# Altium PCB XILINX ARTIX-7 FPGA A704 Motherboard_CON.PcbDoc
Units mil, origin at the board's own origin, x right, y up, seen from the top; angles counter-clockwise.
Board outline 3196.9 x 1937.1 mil, 4 copper layers (TOP, L2_G, L3_P, BOTTOM), stack 33.77 mil thick; 3 components, 169 nets, 200 pads, 0 vias.
Unrouted connection lines stored in the file: 25.
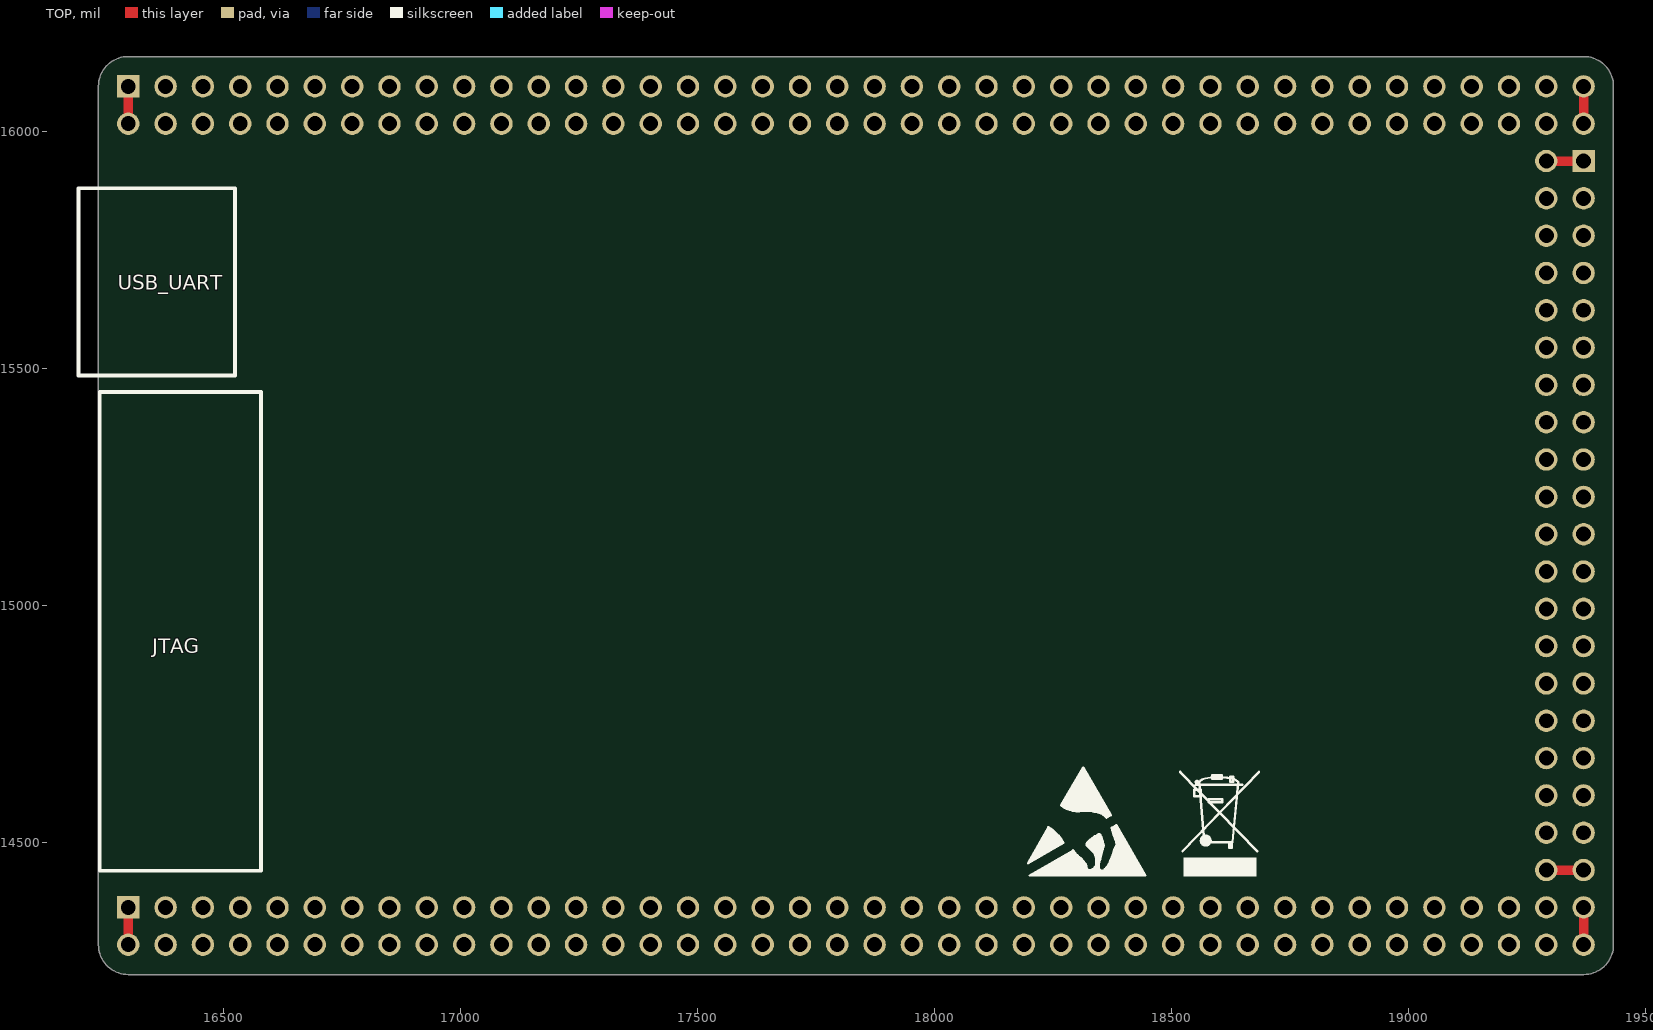
[diagram p0: TOP view]
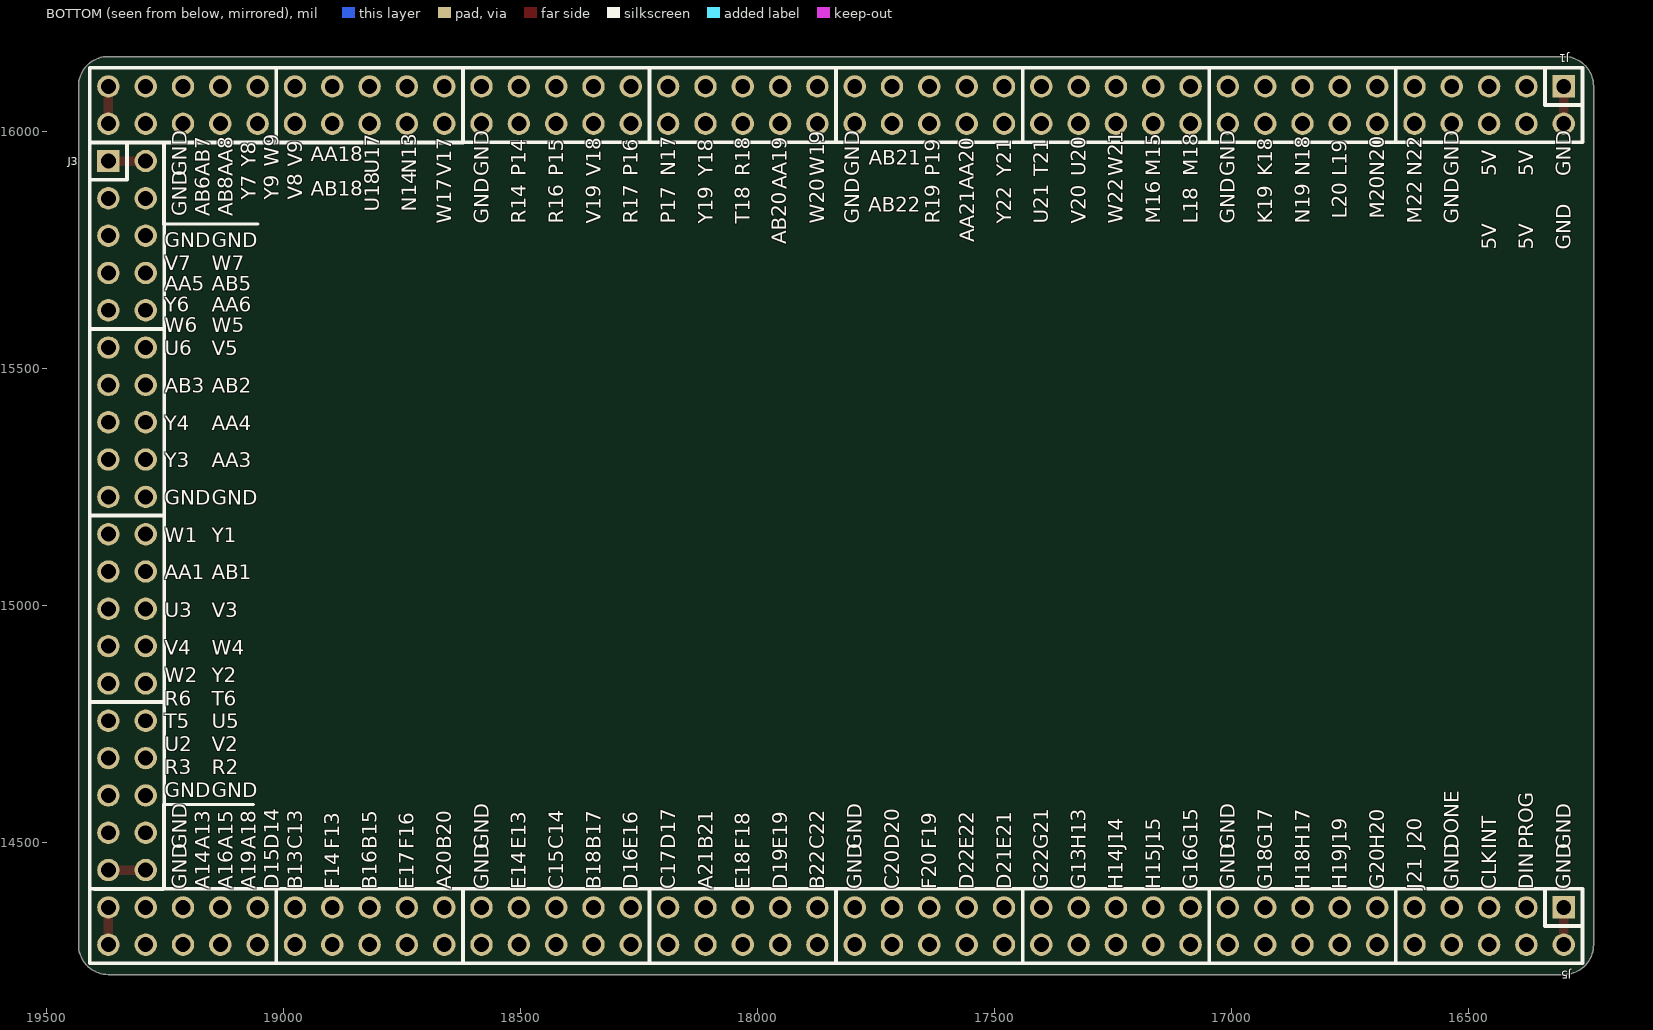
[diagram p1: BOTTOM view, seen from below]
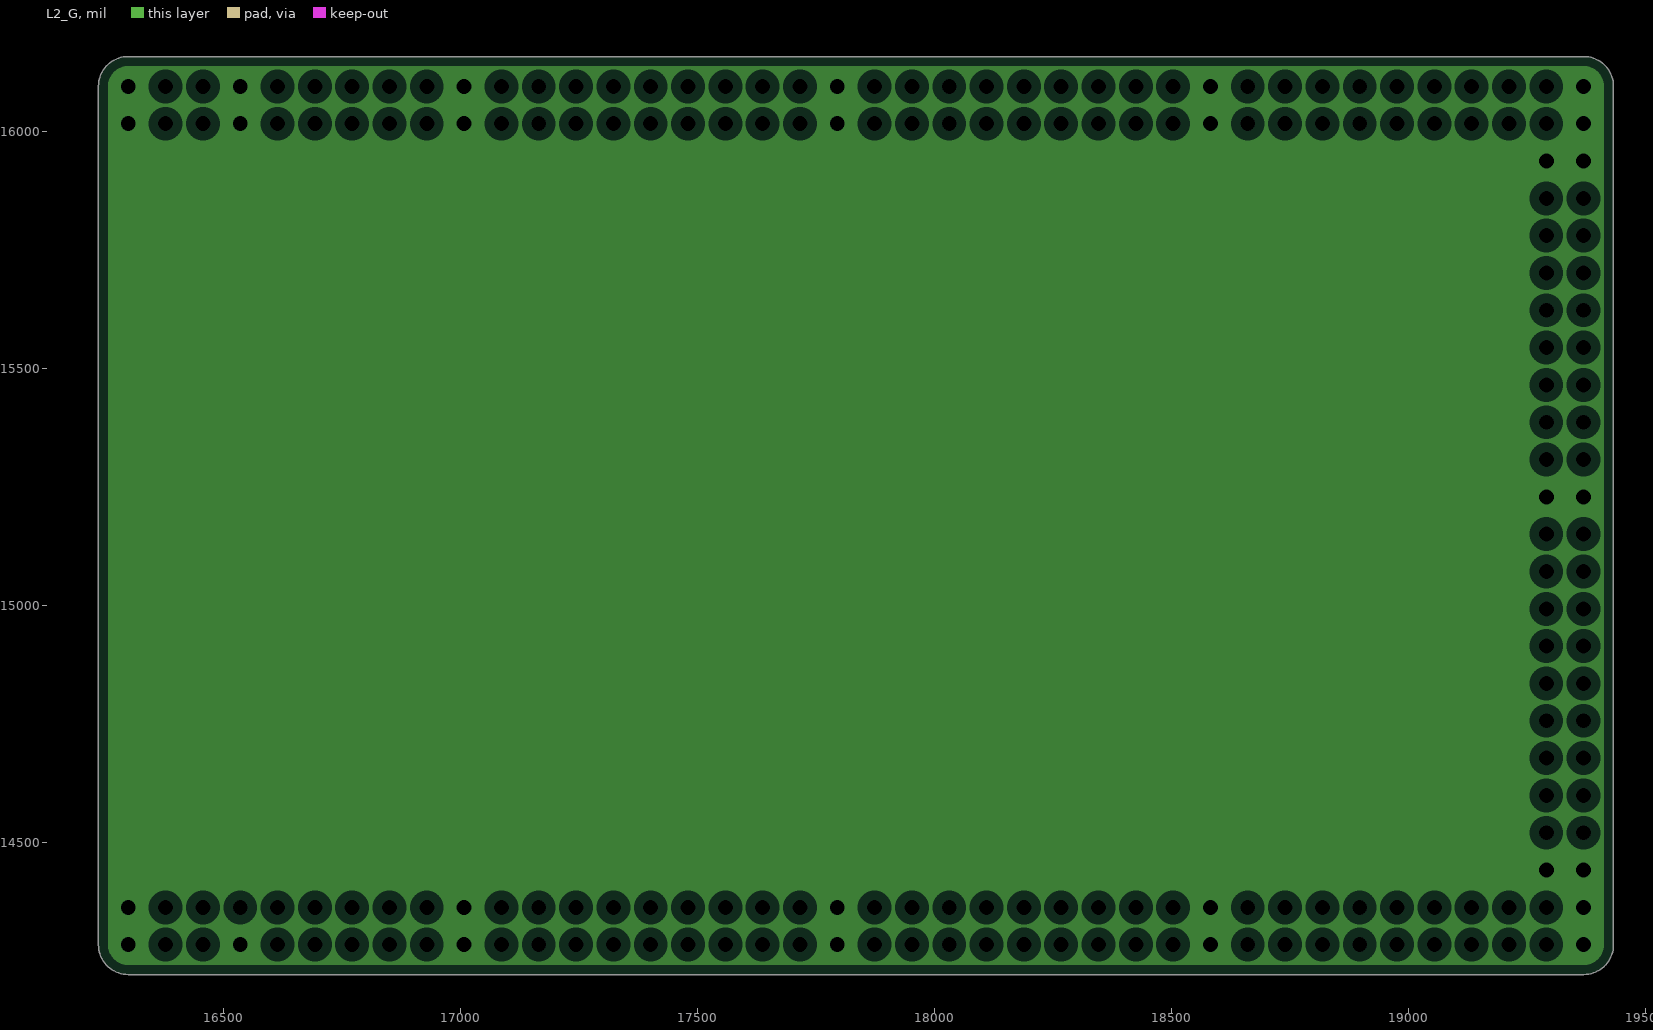
[diagram p2: L2_G, clearances drawn from the general rule]
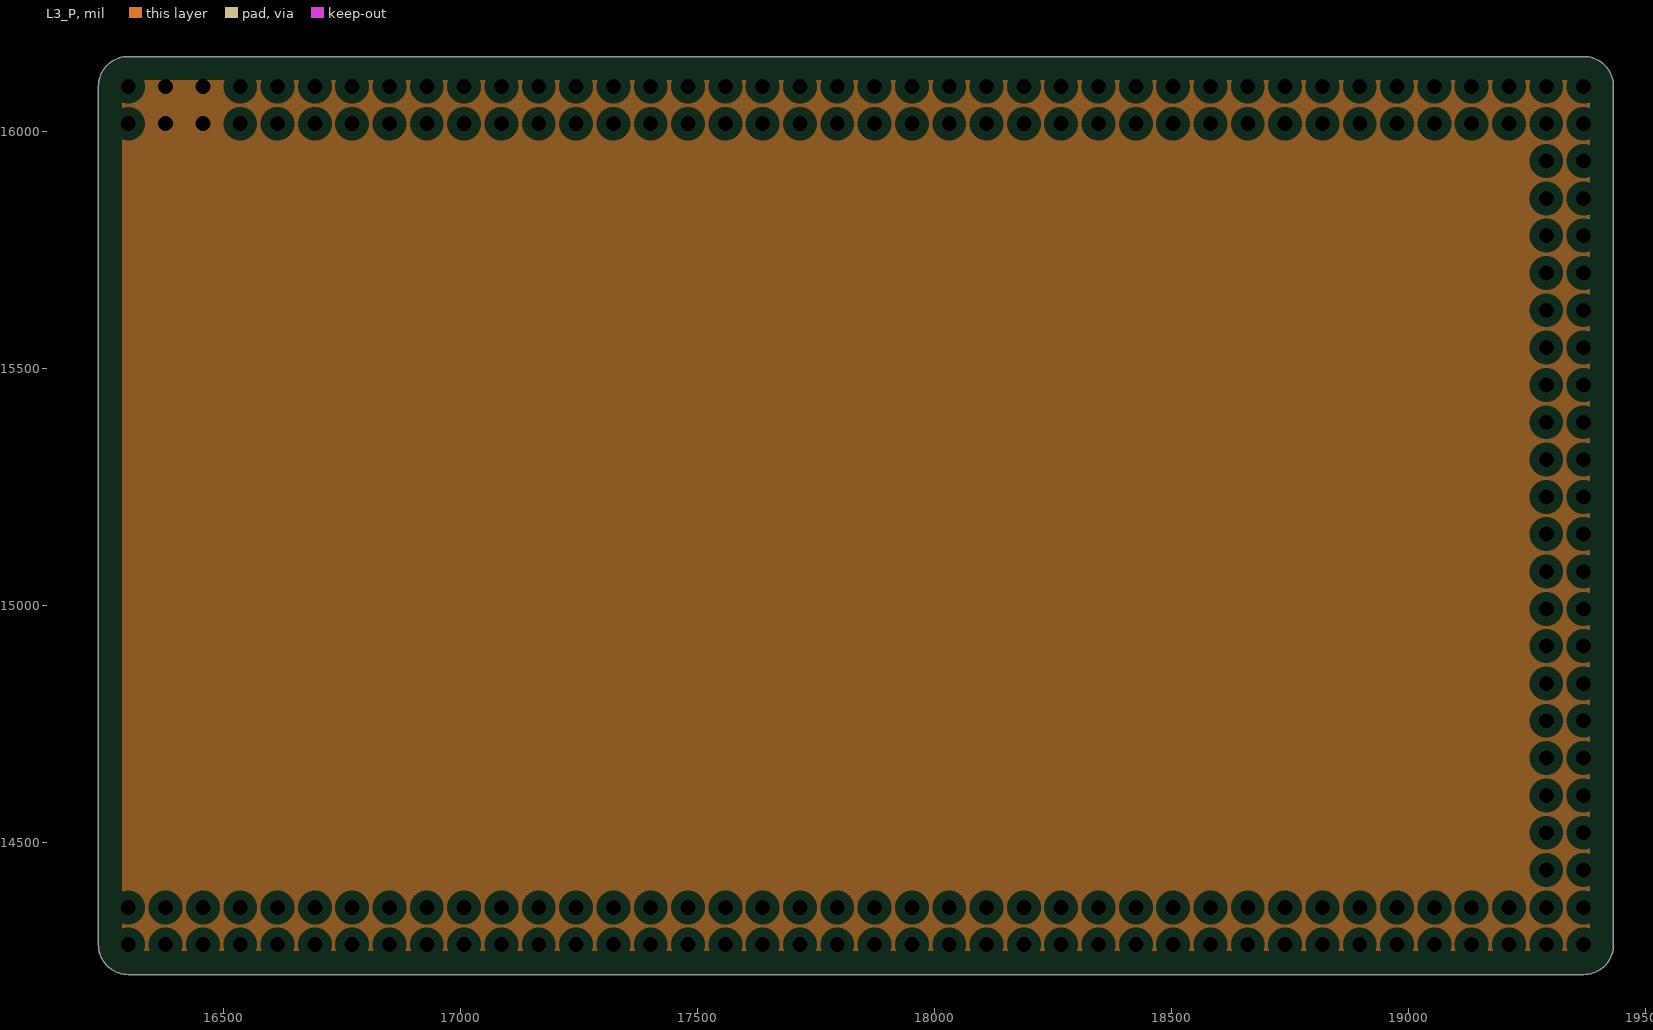
[diagram p3: L3_P, clearances drawn from the general rule]

## Layer stack, top to bottom
TOP: signal copper 1.38
Dielectric: core 3.01, FR-4, Dk 4.3
L2_G: plane copper 1.4, net GND
Dielectric: prepreg 12.6, FR-4, Dk 4.8
L3_P: plane copper 1.4, net +5V
Dielectric: core 12.6, FR-4, Dk 4.8
BOTTOM: signal copper 1.38

## Board outline
16235.38,14283.97 ccw(c16298.38,14283.97) 16298.38,14220.97 19369.38,14220.97 ccw(c19369.38,14283.87) 19432.28,14283.87 19432.28,16095.07 ccw(c19369.28,16095.07) 19369.28,16158.07 16298.38,16158.07 ccw(c16298.38,16095.07) 16235.38,16095.07

## Design rules (kind name [scope] priority, off if disabled: settings)
Clearance [All] p1: gap=10
ComponentClearance [All] p1 off: gap=10 collisioncheckmode=3 verticalgap=10 showdistances=FALSE
MinimumSolderMaskSliver [All] p1 off: minsoldermaskwidth=10
PlaneClearance [All] p1: clearance=20
PlaneConnect [All] p1: planeconnectstyle=Direct reliefexpansion=20 reliefentries=4 reliefconductorwidth=10 reliefairgap=10
PolygonConnect [All] p1: connectstyle=Direct reliefconductorwidth=10 reliefentries=4 polygonreliefangle="90 Angle"
RoutingVias [All] p1: holewidth=28 width=50 viastyle="Through Hole" minholewidth=28 minwidth=50 maxholewidth=28 maxwidth=50
SilkToSilkClearance [All] p1 off: silktosilkclearance=10
SilkscreenOverComponentPads [All] p1 off: minsilkscreentomaskgap=10
SolderMaskExpansion [All] p1: expansion=4
Width [All] p1: maxlimit=100 minlimit=4 preferedwidth=10
22 further rules are at their usual default settings.

## Components (designator, comment, footprint, x,y, rotation, side; value= is the part's Value field where it differs from the comment)
J1 "CONN PLUG 40x2" HDR2X40_2P0 17833.84,16055.65 r180 bottom locked
J3 "CONN PLUG 20x2" HDR2X20_2P0 19329.87,15189.31 r90 bottom locked
J5 "CONN PLUG 40x2" HDR2X40_2P0 17833.84,14323.37 r180 bottom locked

## Footprints (in the part's own frame and the unit in brackets; to place one, negate y for a bottom-side part, rotate by r counter-clockwise, add the part's x,y. Pads: shape width x height; smd on the part's side, far side on the other; paste and mask are expansions set on the pad)
HDR2X20_2P0 [mil] "HDR2X20_2P0"
  rect 47.24x47.24 hole 31.5: 1(748.23,39.37)
  round 47.24 hole 31.5: 2(748.23,-39.37) 3(669.49,39.37) 4(669.49,-39.37) 5(590.75,39.37) 6(590.75,-39.37) 7(512.01,39.37) 8(512.01,-39.37) 9(433.27,39.37) 10(433.27,-39.37) 11(354.53,39.37) 12(354.53,-39.37) 13(275.79,39.37) 14(275.79,-39.37) 15(197.05,39.37) 16(197.05,-39.37) 17(118.31,39.37) 18(118.31,-39.37) 19(39.57,39.37) 20(39.57,-39.37) 21(-39.17,39.37) 22(-39.17,-39.37) 23(-117.91,39.37) 24(-117.91,-39.37) 25(-196.65,39.37) 26(-196.65,-39.37) 27(-275.39,39.37) 28(-275.39,-39.37) 29(-354.13,39.37) 30(-354.13,-39.37) 31(-432.87,39.37) 32(-432.87,-39.37) 33(-511.61,39.37) 34(-511.61,-39.37) 35(-590.35,39.37) 36(-590.35,-39.37) 37(-669.09,39.37) 38(-669.09,-39.37) 39(-747.83,39.37) 40(-747.83,-39.37)
  silkscreen extent -787,-79 788,79
HDR2X40_2P0 [mil] "HDR2X40_2P0"
  rect 47.24x47.24 hole 31.5: 1(1535.46,39.37)
  round 47.24 hole 31.5: 2(1535.46,-39.37) 3(1456.72,39.37) 4(1456.72,-39.37) 5(1377.98,39.37) 6(1377.98,-39.37) 7(1299.24,39.37) 8(1299.24,-39.37) 9(1220.5,39.37) 10(1220.5,-39.37) 11(1141.76,39.37) 12(1141.76,-39.37) 13(1063.02,39.37) 14(1063.02,-39.37) 15(984.28,39.37) 16(984.28,-39.37) 17(905.54,39.37) 18(905.54,-39.37) 19(826.8,39.37) 20(826.8,-39.37) 21(748.06,39.37) 22(748.06,-39.37) 23(669.32,39.37) 24(669.32,-39.37) 25(590.58,39.37) 26(590.58,-39.37) 27(511.84,39.37) 28(511.84,-39.37) 29(433.1,39.37) 30(433.1,-39.37) 31(354.36,39.37) 32(354.36,-39.37) 33(275.62,39.37) 34(275.62,-39.37) 35(196.88,39.37) 36(196.88,-39.37) 37(118.14,39.37) 38(118.14,-39.37) 39(39.4,39.37) 40(39.4,-39.37) 41(-39.34,39.37) 42(-39.34,-39.37) 43(-118.08,39.37) 44(-118.08,-39.37) 45(-196.82,39.37) 46(-196.82,-39.37) 47(-275.56,39.37) 48(-275.56,-39.37) 49(-354.3,39.37) 50(-354.3,-39.37) 51(-433.04,39.37) 52(-433.04,-39.37) 53(-511.78,39.37) 54(-511.78,-39.37) 55(-590.52,39.37) 56(-590.52,-39.37) 57(-669.26,39.37) 58(-669.26,-39.37) 59(-748,39.37) 60(-748,-39.37) 61(-826.74,39.37) 62(-826.74,-39.37) 63(-905.48,39.37) 64(-905.48,-39.37) 65(-984.22,39.37) 66(-984.22,-39.37) 67(-1062.96,39.37) 68(-1062.96,-39.37) 69(-1141.7,39.37) 70(-1141.7,-39.37) 71(-1220.44,39.37) 72(-1220.44,-39.37) 73(-1299.18,39.37) 74(-1299.18,-39.37) 75(-1377.92,39.37) 76(-1377.92,-39.37) 77(-1456.66,39.37) 78(-1456.66,-39.37) 79(-1535.4,39.37) 80(-1535.4,-39.37)
  silkscreen extent -1575,-79 1575,79

## Part data
J3: library part "CONN PLUG 20x2_0"

## Nets (pads, with @x,y where several pads share a name; then routed paths per layer and width w, separated by ;. In a path a pad name is that pad's centre, name@x,y a point inside that pad or via, vN(x,y) a via of type N, cw(c..) or ccw(c..) an arc to the next point about the centre after c; other vN are vias at no path point)
+5V: J1.3 J1.4 J1.5 J1.6
A13_L10P_16: J5.77
A14_L10N_16: J5.78
A15_L9P_16: J5.75
A16_L9N_16: J5.76
A18_L17P_16: J5.73
A19_L17N_16: J5.74
A20_L16N_16: J5.62
A21_L21N_16: J5.48
AA1_L7P_34: J3.23
AA3_L9N_34: J3.18
AA4_L11N_SRCC_34: J3.16
AA5_L10P_34: J3.5
AA6_L18N_34: J3.8
AA8_L22P_34: J1.75
AA18_L17P_14: J1.67
AA19_L15P_14: J1.43
AA20_L8P_14: J1.33
AA21_L8N_14: J1.34
AB1_L7N_34: J3.24
AB2_L8N_34: J3.14
AB3_L8P_34: J3.13
AB5_L10N_34: J3.6
AB6_L20N_34: J1.78
AB7_L20P_34: J1.77
AB8_L22N_34: J1.76
AB18_L17N_14: J1.68
AB20_L15N_14: J1.44
AB21_L10P_14: J1.37
AB22_L10N_14: J1.38
B13_L8N_16: J5.70
B15_L7P_16: J5.65
B16_L7N_16: J5.66
B17_L11P_SRCC_16: J5.53
B18_L11N_SRCC_16: J5.54
B20_L16P_16: J5.61
B21_L21P_16: J5.47
B22_L20N_16: J5.42
C13_L8P_16: J5.69
C14_L3P_16: J5.55
C15_L3N_16: J5.56
C17_L12N_MRCC_16: J5.50
C20_L19N_16: J5.38
C22_L20P_16: J5.41
D14_L6P_16: J5.71
D15_L6N_16: J5.72
D16_L5N_16: J5.52
D17_L12P_MRCC_16: J5.49
D19_L14N_SRCC_16: J5.44
D20_L19P_16: J5.37
D21_L23N_16: J5.32
D22_L22N_16: J5.34
E13_L4P_16: J5.57
E14_L4N_16: J5.58
E16_L5P_16: J5.51
E17_L2N_16: J5.64
E18_L15N_16: J5.46
E19_L14P_SRCC_16: J5.43
E21_L23P_16: J5.31
E22_L22P_16: J5.33
F13_L1P_16: J5.67
F14_L1N_16: J5.68
F16_L2P_16: J5.63
F18_L15P_16: J5.45
F19_L18P_16: J5.35
F20_L18N_16: J5.36
G11_DONE_0: J5.7
G13_L1N_15: J5.28
G15_L2P_15: J5.21
G16_L2N_15: J5.22
G17_L4P_15: J5.17
G18_L4N_15: J5.18
G20_L8N_15: J5.12
G21_L24P_16: J5.29
G22_L24N_16: J5.30
GND: J1.1 J1.2 J1.7 J1.8 J1.19 J1.20 J1.39 J1.40 J1.59 J1.60 J1.79 J1.80 J3.1 J3.2 J3.19 J3.20 J3.39 J3.40 J5.1 J5.2 J5.8 J5.19 J5.20 J5.39 J5.40 J5.59 J5.60 J5.79 J5.80 | length 472.4
  TOP w20: J5.2 J5.1 ; J1.2 J1.1 ; J3.40 J3.39 ; J3.2 J3.1 ; J5.80 J5.79 ; J1.80 J1.79
H13_L1P_15: J5.27
H14_L3N_15: J5.26
H15_L5N_15: J5.24
H17_L6P_15: J5.15
H18_L6N_15: J5.16
H19_L12N_MRCC_15: J5.14
H20_L8P_15: J5.11
J14_L3P_15: J5.25
J15_L5P_15: J5.23
J19_L12P_MRCC_15: J5.13
J20_L11P_SRCC_15: J5.9
J21_L11N_SRCC_15: J5.10
K18_L13P_MRCC_15: J1.17
K19_L13N_MRCC_15: J1.18
L12_CCLK_0: J5.6
L18_L16N_15: J1.22
L19_L14P_SRCC_15: J1.13
L20_L14N_SRCC_15: J1.14
M15_L24P_15: J1.23
M16_L24N_15: J1.24
M18_L16P_15: J1.21
M20_L18N_15: J1.12
M22_L15N_15: J1.10
N12_PROGRAM_B_0: J5.3
N13_L23P_14: J1.63
N14_L23N_14: J1.64
N17_L21P_14: J1.49
N18_L17P_15: J1.15
N19_L17N_15: J1.16
N20_L18P_15: J1.11
N22_L15P_15: J1.9
P14_L19P_14: J1.57
P15_L22P_14: J1.55
P16_L24P_14: J1.51
P17_L21N_14: J1.50
P19_L5P_14: J1.35
R2_L3N_34: J3.38
R3_L3P_34: J3.37
R6_L17P_34: J3.31
R14_L19N_14: J1.58
R16_L22N_14: J1.56
R17_L24N_14: J1.52
R18_L20P_14: J1.45
R19_L5N_14: J1.36
R22_IO_DIN_14: J5.4
T5_L14P_SRCC_34: J3.33
T6_L17N_34: J3.32
T18_L20N_14: J1.46
T21_L4P_14: J1.29
U2_L2P_34: J3.35
U3_L6P_34: J3.25
U5_L14N_SRCC_34: J3.34
U6_L16P_34: J3.11
U12_INIT_B_0: J5.5
U17_L18P_14: J1.65
U18_L18N_14: J1.66
U20_L11P_SRCC_14: J1.27
U21_L4N_14: J1.30
V2_L2N_34: J3.36
V3_L6N_34: J3.26
V4_L12P_MRCC_34: J3.27
V5_L16N_34: J3.12
V7_L19P_34: J3.3
V8_L21N_34: J1.70
V9_L21P_34: J1.69
V17_L16P_14: J1.61
V18_L14P_SRCC_14: J1.53
V19_L14N_SRCC_14: J1.54
V20_L11N_SRCC_14: J1.28
W1_L5P_34: J3.21
W2_L4P_34: J3.29
W4_L12N_MRCC_34: J3.28
W5_L15N_34: J3.10
W6_L15P_34: J3.9
W7_L19N_34: J3.4
W9_L24P_34: J1.71
W17_L16N_14: J1.62
W19_L12P_MRCC_14: J1.41
W20_L12N_MRCC_14: J1.42
W21_L7P_14: J1.25
W22_L7N_14: J1.26
Y1_L5N_34: J3.22
Y2_L4N_34: J3.30
Y3_L9P_34: J3.17
Y4_L11P_SRCC_34: J3.15
Y6_L18P_34: J3.7
Y7_L23N_34: J1.74
Y8_L23P_34: J1.73
Y9_L24N_34: J1.72
Y18_L13P_MRCC_14: J1.47
Y19_L13N_MRCC_14: J1.48
Y21_L9P_14: J1.31
Y22_L9N_14: J1.32

## Polygon pours and split planes (outlines as drawn)
no net on Top Overlay (solid): 18584.12,14503.67 18584.13,14503.67 18584.08,14504.74 18583.94,14505.8 18583.71,14506.84 18583.39,14507.86 18582.98,14508.85 18582.49,14509.8 18581.91,14510.7 18581.26,14511.55 18580.54,14512.34 18579.75,14513.06 18578.9,14513.71 18578,14514.29 18577.05,14514.78 18576.06,14515.19 18575.04,14515.51 18574,14515.74 18572.94,14515.88 18571.87,14515.93 18570.8,14515.88 18569.74,14515.74 18568.7,14515.51 18567.68,14515.19 18566.69,14514.78 18565.74,14514.29 18564.84,14513.71 18563.99,14513.06 18563.2,14512.34 18562.48,14511.55 18561.83,14510.7 18561.25,14509.8 18560.76,14508.85 18560.35,14507.86 18560.03,14506.84 18559.8,14505.8 18559.66,14504.74 18559.61,14503.67 18559.66,14502.6 18559.8,14501.54 18560.03,14500.5 18560.35,14499.48 18560.76,14498.49 18561.25,14497.54 18561.83,14496.64 18562.48,14495.79 18563.2,14495 18563.99,14494.28 18564.84,14493.63 18565.74,14493.05 18566.69,14492.56 18567.68,14492.15 18568.7,14491.83 18569.74,14491.6 18570.8,14491.46 18571.87,14491.41 18572.94,14491.46 18574,14491.6 18575.04,14491.83 18576.06,14492.15 18577.05,14492.56 18578,14493.05 18578.9,14493.63 18579.75,14494.28 18580.54,14495 18581.26,14495.79 18581.91,14496.64 18582.49,14497.54 18582.98,14498.49 18583.39,14499.48 18583.71,14500.5 18583.94,14501.54 18584.08,14502.6 18584.12,14503.67
no net on Top Overlay (solid): 18574.85,14503.7 18574.84,14503.98 18574.8,14504.25 18574.74,14504.52 18574.66,14504.78 18574.55,14505.04 18574.43,14505.28 18574.28,14505.52 18574.11,14505.74 18573.92,14505.94 18573.72,14506.13 18573.5,14506.3 18573.26,14506.45 18573.02,14506.57 18572.76,14506.68 18572.5,14506.76 18572.23,14506.82 18571.96,14506.86 18571.68,14506.87 18571.4,14506.86 18571.13,14506.82 18570.86,14506.76 18570.6,14506.68 18570.34,14506.57 18570.1,14506.45 18569.86,14506.3 18569.64,14506.13 18569.44,14505.94 18569.25,14505.74 18569.08,14505.52 18568.93,14505.28 18568.81,14505.04 18568.7,14504.78 18568.62,14504.52 18568.56,14504.25 18568.52,14503.98 18568.52,14503.7 18568.51,14503.7 18568.52,14503.42 18568.56,14503.15 18568.62,14502.88 18568.7,14502.62 18568.81,14502.36 18568.93,14502.11 18569.08,14501.88 18569.25,14501.66 18569.44,14501.46 18569.64,14501.27 18569.86,14501.1 18570.1,14500.95 18570.34,14500.83 18570.6,14500.72 18570.86,14500.64 18571.13,14500.58 18571.4,14500.54 18571.68,14500.53 18571.96,14500.54 18572.23,14500.58 18572.5,14500.64 18572.76,14500.72 18573.02,14500.83 18573.26,14500.95 18573.5,14501.1 18573.72,14501.27 18573.92,14501.46 18574.11,14501.66 18574.28,14501.88 18574.43,14502.11 18574.55,14502.36 18574.66,14502.62 18574.74,14502.88 18574.8,14503.15 18574.84,14503.42 18574.85,14503.7
no net on Top Overlay (solid): 18558.08,14626.96 18558.09,14626.96 18558.07,14627.36 18558.02,14627.76 18557.93,14628.16 18557.81,14628.54 18557.66,14628.91 18557.47,14629.27 18557.25,14629.61 18557.01,14629.93 18556.74,14630.23 18556.44,14630.5 18556.12,14630.74 18555.78,14630.96 18555.42,14631.15 18555.05,14631.3 18554.67,14631.42 18554.27,14631.51 18553.87,14631.56 18553.47,14631.58 18553.07,14631.56 18552.67,14631.51 18552.27,14631.42 18551.89,14631.3 18551.52,14631.15 18551.16,14630.96 18550.82,14630.74 18550.5,14630.5 18550.2,14630.23 18549.93,14629.93 18549.69,14629.61 18549.47,14629.27 18549.28,14628.91 18549.13,14628.54 18549.01,14628.16 18548.92,14627.76 18548.87,14627.36 18548.85,14626.96 18548.87,14626.56 18548.92,14626.16 18549.01,14625.76 18549.13,14625.38 18549.28,14625.01 18549.47,14624.65 18549.69,14624.31 18549.93,14623.99 18550.2,14623.69 18550.5,14623.42 18550.82,14623.18 18551.16,14622.96 18551.52,14622.77 18551.89,14622.62 18552.27,14622.5 18552.67,14622.41 18553.07,14622.36 18553.47,14622.34 18553.87,14622.36 18554.27,14622.41 18554.67,14622.5 18555.05,14622.62 18555.42,14622.77 18555.78,14622.96 18556.12,14623.18 18556.44,14623.42 18556.74,14623.69 18557.01,14623.99 18557.25,14624.31 18557.47,14624.65 18557.66,14625.01 18557.81,14625.38 18557.93,14625.76 18558.02,14626.16 18558.07,14626.56 18558.08,14626.96
no net on Top Overlay (solid): 18525.61,14428.03 18525.61,14467.03 18678.61,14467.03 18678.61,14428.03 18525.61,14428.03
GND on L2_G (split plane): 19374.89,16137.69 19380.41,16136.6 19385.73,16134.79 19390.78,16132.3 19395.45,16129.18 19399.68,16125.47 19403.39,16121.24 19406.51,16116.57 19409,16111.52 19410.81,16106.2 19411.9,16100.68 19412.24,16095.61 19412.18,16095.07 19412.18,14283.87 19412.24,14283.33 19411.9,14278.27 19410.81,14272.77 19409.01,14267.46 19406.53,14262.42 19403.41,14257.76 19399.71,14253.54 19395.49,14249.84 19390.83,14246.72 19385.79,14244.24 19380.48,14242.44 19374.98,14241.35 19369.92,14241.01 19369.38,14241.07 16298.38,14241.07 16297.84,14241.01 16292.77,14241.35 16287.25,14242.44 16281.93,14244.25 16276.88,14246.74 16272.21,14249.86 16267.98,14253.57 16264.27,14257.8 16261.15,14262.47 16258.66,14267.52 16256.85,14272.84 16255.76,14278.36 16255.42,14283.43 16255.48,14283.97 16255.48,16095.07 16255.42,16095.61 16255.76,16100.68 16256.85,16106.2 16258.66,16111.52 16261.15,16116.57 16264.27,16121.24 16267.98,16125.47 16272.21,16129.18 16276.88,16132.3 16281.93,16134.79 16287.25,16136.6 16292.77,16137.69 16297.84,16138.03 16298.38,16137.97 19369.28,16137.97 19369.82,16138.03
+5V on L3_P (split plane): 16298.38,16107.99 19369.28,16107.99 19369.55,16108.01 19371.81,16107.78 19374.24,16107.05 19376.48,16105.85 19378.45,16104.24 19380.06,16102.27 19381.26,16100.03 19381.99,16097.6 19382.22,16095.34 19382.2,16095.07 19382.2,14283.87 19382.22,14283.61 19381.99,14281.36 19381.26,14278.95 19380.07,14276.72 19378.47,14274.78 19376.53,14273.18 19374.3,14271.99 19371.89,14271.26 19369.64,14271.03 19369.38,14271.05 16298.38,14271.05 16298.11,14271.03 16295.85,14271.26 16293.42,14271.99 16291.18,14273.19 16289.21,14274.8 16287.6,14276.77 16286.4,14279.01 16285.67,14281.44 16285.44,14283.7 16285.46,14283.97 16285.46,16095.07 16285.44,16095.34 16285.67,16097.6 16286.4,16100.03 16287.6,16102.27 16289.21,16104.24 16291.18,16105.85 16293.42,16107.05 16295.85,16107.78 16298.11,16108.01

## Silkscreen, mask and mechanical layers (free items; w line width, h text height)
Top Overlay:
  drawing of 403 lines, arcs and shapes, not listed
  text "USB_UART" at 16276.48,15665.57 h31
  text "JTAG" at 16348.48,14898.47 h31
Bottom Overlay:
  lines w6: 19053.38,15804.97 19253.38,15804.97 19253.38,15974.97 19403.38,15974.97 ; 19063.38,14579.97 19253.38,14579.97 19253.38,14399.97 19398.38,14399.97
  text "AA18" at 18942.38,15937.5 h31
  text "AB21" at 17765.28,15930 h31
  text "V9" at 18960.65,15925.67 h31 r270
  text "W9" at 19009.39,15925.67 h31 r270
  text "Y8" at 19058.13,15925.67 h31 r270
  text "N13" at 18719.43,15910.67 h31 r270
  text "U17" at 18798.17,15910.67 h31 r270
  text "GND" at 16283.49,15905.67 h31 r270
  text "5V" at 16362.23,15905.67 h31 r270
  text "5V" at 16440.97,15905.67 h31 r270
  text "GND" at 16519.71,15905.67 h31 r270
  text "N22" at 16598.45,15905.67 h31 r270
  text "N20" at 16677.19,15905.67 h31 r270
  text "L19" at 16755.93,15905.67 h31 r270
  text "N18" at 16834.67,15905.67 h31 r270
  text "K18" at 16913.41,15905.67 h31 r270
  text "GND" at 16992.15,15905.67 h31 r270
  text "M18" at 17070.89,15905.67 h31 r270
  text "M15" at 17149.63,15905.67 h31 r270
  text "W21" at 17228.37,15905.67 h31 r270
  text "U20" at 17307.11,15905.67 h31 r270
  text "T21" at 17385.85,15905.67 h31 r270
  text "Y21" at 17464.59,15905.67 h31 r270
  text "P19" at 17615.07,15905.67 h31 r270
  text "GND" at 17784.55,15905.67 h31 r270
  text "W19" at 17858.29,15905.67 h31 r270
  text "R18" at 18015.77,15905.67 h31 r270
  text "Y18" at 18094.51,15905.67 h31 r270
  text "N17" at 18173.25,15905.67 h31 r270
  text "P16" at 18251.99,15905.67 h31 r270
  text "V18" at 18330.73,15905.67 h31 r270
  text "P15" at 18409.47,15905.67 h31 r270
  text "P14" at 18488.21,15905.67 h31 r270
  text "GND" at 18566.95,15905.67 h31 r270
  text "V17" at 18645.69,15905.67 h31 r270
  text "AA8" at 19106.87,15905.67 h31 r270
  text "AB7" at 19155.61,15905.67 h31 r270
  text "GND" at 19204.35,15905.67 h31 r270
  text "AA19" at 17938.23,15878.17 h31 r270
  text "AA20" at 17542.83,15876.67 h31 r270
  text "AB18" at 18941.88,15864.7 h31
  text "V8" at 18960.65,15855.67 h31 r270
  text "Y9" at 19009.39,15855.67 h31 r270
  text "Y7" at 19058.13,15855.67 h31 r270
  text "N14" at 18719.43,15830.67 h31 r270
  text "U18" at 18798.17,15830.67 h31 r270
  text "AB22" at 17766.08,15830.4 h31
  text "AB8" at 19106.87,15820.67 h31 r270
  text "AB6" at 19155.61,15820.67 h31 r270
  text "GND" at 19204.35,15820.67 h31 r270
  text "M20" at 16677.19,15815.67 h31 r270
  text "L20" at 16755.93,15815.67 h31 r270
  text "GND" at 16519.71,15805.67 h31 r270
  text "M22" at 16598.45,15805.67 h31 r270
  text "N19" at 16834.67,15805.67 h31 r270
  text "K19" at 16913.41,15805.67 h31 r270
  text "GND" at 16992.15,15805.67 h31 r270
  text "L18" at 17070.89,15805.67 h31 r270
  text "M16" at 17149.63,15805.67 h31 r270
  text "W22" at 17228.37,15805.67 h31 r270
  text "V20" at 17307.11,15805.67 h31 r270
  text "U21" at 17385.85,15805.67 h31 r270
  text "Y22" at 17464.59,15805.67 h31 r270
  text "R19" at 17615.07,15805.67 h31 r270
  text "GND" at 17784.55,15805.67 h31 r270
  text "W20" at 17858.29,15805.67 h31 r270
  text "T18" at 18015.77,15805.67 h31 r270
  text "Y19" at 18094.51,15805.67 h31 r270
  text "P17" at 18173.25,15805.67 h31 r270
  text "R17" at 18251.99,15805.67 h31 r270
  text "V19" at 18330.73,15805.67 h31 r270
  text "R16" at 18409.47,15805.67 h31 r270
  text "R14" at 18488.21,15805.67 h31 r270
  text "GND" at 18566.95,15805.67 h31 r270
  text "W17" at 18645.69,15805.67 h31 r270
  text "AA21" at 17541.83,15765.97 h31 r270
  text "AB20" at 17938.53,15762.27 h31 r270
  text "GND" at 19150.78,15756 h31
  text "GND" at 19250.78,15756 h31
  text "GND" at 16283.49,15750.67 h31 r270
  text "5V" at 16362.23,15750.67 h31 r270
  text "5V" at 16440.97,15750.67 h31 r270
  text "W7" at 19150.78,15707.26 h31
  text "V7" at 19250.78,15707.26 h31
  text "AB5" at 19150.78,15663.52 h31
  text "AA5" at 19250.78,15663.52 h31
  text "AA6" at 19150.78,15619.78 h31
  text "Y6" at 19250.78,15619.78 h31
  text "W5" at 19150.78,15576.04 h31
  text "W6" at 19250.78,15576.04 h31
  text "V5" at 19150.78,15527.3 h31
  text "U6" at 19250.78,15527.3 h31
  text "AB2" at 19150.78,15448.56 h31
  text "AB3" at 19250.78,15448.56 h31
  text "AA4" at 19150.78,15369.82 h31
  text "Y4" at 19250.78,15369.82 h31
  text "AA3" at 19150.78,15291.08 h31
  text "Y3" at 19250.78,15291.08 h31
  text "GND" at 19150.78,15212.34 h31
  text "GND" at 19250.78,15212.34 h31
  text "Y1" at 19150.78,15133.6 h31
  text "W1" at 19250.78,15133.6 h31
  text "AB1" at 19150.78,15054.86 h31
  text "AA1" at 19250.78,15054.86 h31
  text "V3" at 19150.78,14974.86 h31
  text "U3" at 19250.78,14974.86 h31
  text "W4" at 19150.78,14896.12 h31
  text "V4" at 19250.78,14896.12 h31
  text "Y2" at 19150.78,14837.38 h31
  text "W2" at 19250.78,14837.38 h31
  text "T6" at 19150.78,14788.64 h31
  text "R6" at 19250.78,14788.64 h31
  text "U5" at 19150.78,14741.16 h31
  text "T5" at 19250.78,14741.16 h31
  text "V2" at 19150.78,14692.42 h31
  text "U2" at 19250.78,14692.42 h31
  text "R2" at 19150.78,14643.68 h31
  text "R3" at 19250.78,14643.68 h31
  text "GND" at 19150.78,14594.94 h31
  text "GND" at 19250.78,14594.94 h31
  text "GND" at 16283.49,14485.67 h31 r270
  text "PROG" at 16362.23,14485.67 h31 r270
  text "INT" at 16440.97,14485.67 h31 r270
  text "DONE" at 16519.71,14485.67 h31 r270
  text "J20" at 16598.45,14485.67 h31 r270
  text "H20" at 16677.19,14485.67 h31 r270
  text "J19" at 16755.93,14485.67 h31 r270
  text "H17" at 16834.67,14485.67 h31 r270
  text "G17" at 16913.41,14485.67 h31 r270
  text "GND" at 16992.15,14485.67 h31 r270
  text "G15" at 17070.89,14485.67 h31 r270
  text "J15" at 17149.63,14485.67 h31 r270
  text "J14" at 17228.37,14485.67 h31 r270
  text "H13" at 17307.11,14485.67 h31 r270
  text "G21" at 17385.85,14485.67 h31 r270
  text "E21" at 17464.59,14485.67 h31 r270
  text "E22" at 17543.33,14485.67 h31 r270
  text "F19" at 17622.07,14485.67 h31 r270
  text "D20" at 17700.81,14485.67 h31 r270
  text "GND" at 17779.55,14485.67 h31 r270
  text "C22" at 17858.29,14485.67 h31 r270
  text "E19" at 17937.03,14485.67 h31 r270
  text "F18" at 18015.77,14485.67 h31 r270
  text "B21" at 18094.51,14485.67 h31 r270
  text "D17" at 18173.25,14485.67 h31 r270
  text "E16" at 18251.99,14485.67 h31 r270
  text "B17" at 18330.73,14485.67 h31 r270
  text "C14" at 18409.47,14485.67 h31 r270
  text "E13" at 18488.21,14485.67 h31 r270
  text "GND" at 18566.95,14485.67 h31 r270
  text "B20" at 18645.69,14485.67 h31 r270
  text "F16" at 18724.43,14485.67 h31 r270
  text "B15" at 18803.17,14485.67 h31 r270
  text "F13" at 18881.91,14485.67 h31 r270
  text "C13" at 18960.65,14485.67 h31 r270
  text "D14" at 19009.39,14485.67 h31 r270
  text "A18" at 19058.13,14485.67 h31 r270
  text "A15" at 19106.87,14485.67 h31 r270
  text "A13" at 19155.61,14485.67 h31 r270
  text "GND" at 19204.35,14485.67 h31 r270
  text "GND" at 16283.49,14400.67 h31 r270
  text "DIN" at 16362.23,14400.67 h31 r270
  text "CLK" at 16440.97,14400.67 h31 r270
  text "GND" at 16519.71,14400.67 h31 r270
  text "J21" at 16598.45,14400.67 h31 r270
  text "G20" at 16677.19,14400.67 h31 r270
  text "H19" at 16755.93,14400.67 h31 r270
  text "H18" at 16834.67,14400.67 h31 r270
  text "G18" at 16913.41,14400.67 h31 r270
  text "GND" at 16992.15,14400.67 h31 r270
  text "G16" at 17070.89,14400.67 h31 r270
  text "H15" at 17149.63,14400.67 h31 r270
  text "H14" at 17228.37,14400.67 h31 r270
  text "G13" at 17307.11,14400.67 h31 r270
  text "G22" at 17385.85,14400.67 h31 r270
  text "D21" at 17464.59,14400.67 h31 r270
  text "D22" at 17543.33,14400.67 h31 r270
  text "F20" at 17622.07,14400.67 h31 r270
  text "C20" at 17700.81,14400.67 h31 r270
  text "GND" at 17779.55,14400.67 h31 r270
  text "B22" at 17858.29,14400.67 h31 r270
  text "D19" at 17937.03,14400.67 h31 r270
  text "E18" at 18015.77,14400.67 h31 r270
  text "A21" at 18094.51,14400.67 h31 r270
  text "C17" at 18173.25,14400.67 h31 r270
  text "D16" at 18251.99,14400.67 h31 r270
  text "B18" at 18330.73,14400.67 h31 r270
  text "C15" at 18409.47,14400.67 h31 r270
  text "E14" at 18488.21,14400.67 h31 r270
  text "GND" at 18566.95,14400.67 h31 r270
  text "A20" at 18645.69,14400.67 h31 r270
  text "E17" at 18724.43,14400.67 h31 r270
  text "B16" at 18803.17,14400.67 h31 r270
  text "F14" at 18881.91,14400.67 h31 r270
  text "B13" at 18960.65,14400.67 h31 r270
  text "D15" at 19009.39,14400.67 h31 r270
  text "A19" at 19058.13,14400.67 h31 r270
  text "A16" at 19106.87,14400.67 h31 r270
  text "A14" at 19155.61,14400.67 h31 r270
  text "GND" at 19204.35,14400.67 h31 r270
OUTLINE:
  drawing of 1126 lines, arcs and shapes, not listed
  text "A" at 32749.92,26859.65 h125
  text "A" at 32749.92,26859.65 h125
  text "B" at 32749.92,26609.65 h125
  text "C" at 32749.92,26359.65 h125
  text "PRINTED WIRING BOARD" at 34984.92,8004.65 h175
DXF:
  lines w8: 17833.81,15228.88 17833.81,15188.88 17873.81,15188.88 ; 16239.35,14284 ccw(c16298.38,14284) 16298.38,14224.97 19369.24,14224.97 ccw(c19369.24,14284) 19428.27,14284 19428.27,16095.02 ccw(c19369.24,16095.02) 19369.24,16154.05 16298.38,16154.05 ccw(c16298.38,16095.02) 16239.35,16095.02 16239.35,14284
DRAWING_ORIGIN:
  lines w1: 16273.38,14224.97 16323.38,14224.97 ; 16298.38,14199.97 16298.38,14249.97
DIMENSION:
  lines w1: 16058.78,15858.8 16107.98,15858.8 ; 16058.78,15858.8 16083.38,16016.28 ; 16058.78,15858.8 16107.98,15858.8 ; 16058.78,15858.8 16083.38,16016.28 ; 16058.78,16252.5 16107.98,16252.5 ; 16058.78,16252.5 16083.38,16095.02 ; 16058.78,16252.5 16107.98,16252.5 ; 16058.78,16252.5 16083.38,16095.02 ; 16083.38,16016.28 16083.38,15701.32 16083.38,16016.28 ; 16083.38,16016.28 16107.98,15858.8 ; 16083.38,16016.28 16107.98,15858.8 ; 16083.38,16095.02 16083.38,16418.48 16083.38,16095.02 ; 16083.38,16095.02 16107.98,16252.5 ; 16083.38,16095.02 16107.98,16252.5 ; 16239.38,13944.97 17788.88,13944.97 16239.38,13944.97 ; 16239.38,13944.97 16396.86,13920.37 ; 16239.38,13944.97 16396.86,13969.57 ; 16239.38,13944.97 16396.86,13920.37 ; 16239.38,13944.97 16396.86,13969.57 ; 16239.38,16399.97 17783.88,16399.97 16239.38,16399.97 ; 16239.38,16399.97 16396.86,16375.37 ; 16239.38,16399.97 16396.86,16424.57 ; 16239.38,16399.97 16396.86,16375.37 ; 16239.38,16399.97 16396.86,16424.57 ; 16298.38,14218.71 17788.61,14218.71 16298.38,14218.71 ; 16298.38,14218.71 16455.86,14194.11 ; 16298.38,14218.71 16455.86,14243.31 ; 16298.38,14218.71 16455.86,14194.11 ; 16298.38,14218.71 16455.86,14243.31 ; 16298.38,16156.23 17778.79,16156.23 16298.38,16156.23 ; 16298.38,16156.23 16455.86,16131.63 ; 16298.38,16156.23 16455.86,16180.83 ; 16298.38,16156.23 16455.86,16131.63 ; 16298.38,16156.23 16455.86,16180.83 ; 16396.86,13920.37 16396.86,13969.57 ; 16396.86,13920.37 16396.86,13969.57 ; 16396.86,16375.37 16396.86,16424.57 ; 16396.86,16375.37 16396.86,16424.57 ; 16455.86,14194.11 16455.86,14243.31 ; 16455.86,14194.11 16455.86,14243.31 ; 16455.86,16131.63 16455.86,16180.83 ; 16455.86,16131.63 16455.86,16180.83 ; 19211.76,14194.11 19211.76,14243.31 ; 19211.76,14194.11 19369.24,14218.71 ; 19211.76,14194.11 19211.76,14243.31 ; 19211.76,14194.11 19369.24,14218.71 ; 19211.76,14243.31 19369.24,14218.71 ; 19211.76,14243.31 19369.24,14218.71 ; 19211.76,16131.63 19211.76,16180.83 ; 19211.76,16131.63 19369.24,16156.23 ; 19211.76,16131.63 19211.76,16180.83 ; 19211.76,16131.63 19369.24,16156.23 ; 19211.76,16180.83 19369.24,16156.23 ; 19211.76,16180.83 19369.24,16156.23 ; 19270.8,13920.37 19270.8,13969.57 ; 19270.8,13920.37 19428.28,13944.97 ; 19270.8,13920.37 19270.8,13969.57 ; 19270.8,13920.37 19428.28,13944.97 ; 19270.8,13969.57 19428.28,13944.97 ; 19270.8,13969.57 19428.28,13944.97 ; 19270.8,16375.37 19270.8,16424.57 ; 19270.8,16375.37 19428.28,16399.97 ; 19270.8,16375.37 19270.8,16424.57 ; 19270.8,16375.37 19428.28,16399.97 ; 19270.8,16424.57 19428.28,16399.97 ; 19270.8,16424.57 19428.28,16399.97 ; 19369.24,14218.71 17957.61,14218.71 19369.24,14218.71 ; 19369.24,16156.23 17947.79,16156.23 19369.24,16156.23 ; 19428.28,13944.97 17957.88,13944.97 19428.28,13944.97 ; 19428.28,16399.97 17952.88,16399.97 19428.28,16399.97 ; 19493.78,14520.22 19542.98,14520.22 ; 19493.78,14520.22 19518.38,14362.74 ; 19493.78,14520.22 19542.98,14520.22 ; 19493.78,14520.22 19518.38,14362.74 ; 19493.78,15858.8 19542.98,15858.8 ; 19493.78,15858.8 19518.38,16016.28 ; 19493.78,15858.8 19542.98,15858.8 ; 19493.78,15858.8 19518.38,16016.28 ; 19518.38,14362.74 19518.38,15168.97 19518.38,14362.74 ; 19518.38,14362.74 19542.98,14520.22 ; 19518.38,14362.74 19542.98,14520.22 ; 19518.38,16016.28 19518.38,15301.97 19518.38,16016.28 ; 19518.38,16016.28 19542.98,15858.8 ; 19518.38,16016.28 19542.98,15858.8 ; 19663.78,14382.45 19712.98,14382.45 ; 19663.78,14382.45 19688.38,14224.97 ; 19663.78,14382.45 19712.98,14382.45 ; 19663.78,14382.45 19688.38,14224.97 ; 19663.78,15996.59 19712.98,15996.59 ; 19663.78,15996.59 19688.38,16154.07 ; 19663.78,15996.59 19712.98,15996.59 ; 19663.78,15996.59 19688.38,16154.07 ; 19688.38,14224.97 19688.38,15173.47 19688.38,14224.97 ; 19688.38,14224.97 19712.98,14382.45 ; 19688.38,14224.97 19712.98,14382.45 ; 19688.38,16154.07 19688.38,15306.47 19688.38,16154.07 ; 19688.38,16154.07 19712.98,15996.59 ; 19688.38,16154.07 19712.98,15996.59 ; 15984.95,16016.28 16199.95,16016.28 15984.95,16016.28 ; 15984.95,16095.02 16199.95,16095.02 15984.95,16095.02 ; 16239.38,13846.54 16239.38,14185.54 16239.38,13846.54 ; 16239.38,16193.5 16239.38,16498.4 16239.38,16193.5 ; 16298.38,14120.28 16298.38,14264.31 16298.38,14120.28 ; 16298.38,16114.71 16298.38,16254.66 16298.38,16114.71 ; 19369.24,14120.28 19369.24,14264.31 19369.24,14120.28 ; 19369.24,16114.71 19369.24,16254.66 19369.24,16114.71 ; 19428.28,13846.54 19428.28,14185.44 19428.28,13846.54 ; 19428.28,16193.5 19428.28,16498.4 19428.28,16193.5 ; 19467.67,14362.74 19616.81,14362.74 19467.67,14362.74 ; 19467.67,16016.28 19616.81,16016.28 19467.67,16016.28 ; 19467.71,16154.07 19786.81,16154.07 19467.71,16154.07 ; 19467.81,14224.97 19786.81,14224.97 19467.81,14224.97
  text "2" at 16064.38,16459.98 h50
  text "2" at 16064.38,16459.98 h50
  text "81" at 17825.38,16374.97 h50
  text "81" at 17825.38,16374.97 h50
  text "78" at 17820.29,16131.23 h50
  text "78" at 17820.29,16131.23 h50
  text "49" at 19645.38,15214.97 h50
  text "49" at 19645.38,15214.97 h50
  text "42" at 19475.38,15210.47 h50
  text "42" at 19475.38,15210.47 h50
  text "78" at 17830.11,14193.71 h50
  text "78" at 17830.11,14193.71 h50
  text "81" at 17830.38,13919.97 h50
  text "81" at 17830.38,13919.97 h50
PIN_NUMBER:

## Text inside footprints (layer, text, board x,y; h text height)
J1: PIN_NUMBER "3" at 16367.12,16095.02 h25 r180; PIN_NUMBER "5" at 16445.86,16095.02 h25 r180; PIN_NUMBER "4" at 16367.12,16016.28 h25 r180; PIN_NUMBER "6" at 16445.86,16016.28 h25 r180; PIN_NUMBER "79" at 19349.24,16095.02 h25 r180; PIN_NUMBER "80" at 19349.24,16016.28 h25 r180; PIN_NUMBER "7" at 16524.6,16095.02 h25 r180; PIN_NUMBER "19" at 16987.04,16095.02 h25 r180; PIN_NUMBER "39" at 17774.44,16095.02 h25 r180; PIN_NUMBER "59" at 18561.84,16095.02 h25 r180; PIN_NUMBER "8" at 16524.6,16016.28 h25 r180; PIN_NUMBER "20" at 16987.04,16016.28 h25 r180; PIN_NUMBER "40" at 17774.44,16016.28 h25 r180; PIN_NUMBER "60" at 18561.84,16016.28 h25 r180; PIN_NUMBER "1" at 16288.38,16095.02 h25 r180; PIN_NUMBER "2" at 16288.38,16016.28 h25 r180; PIN_NUMBER "68" at 18876.8,16016.28 h25 r180; PIN_NUMBER "67" at 18876.8,16095.02 h25 r180; PIN_NUMBER "48" at 18089.4,16016.28 h25 r180; PIN_NUMBER "47" at 18089.4,16095.02 h25 r180; PIN_NUMBER "61" at 18640.58,16095.02 h25 r180; PIN_NUMBER "62" at 18640.58,16016.28 h25 r180; PIN_NUMBER "44" at 17931.92,16016.28 h25 r180; PIN_NUMBER "43" at 17931.92,16095.02 h25 r180; PIN_NUMBER "38" at 17695.7,16016.28 h25 r180; PIN_NUMBER "37" at 17695.7,16095.02 h25 r180; PIN_NUMBER "34" at 17538.22,16016.28 h25 r180; PIN_NUMBER "33" at 17538.22,16095.02 h25 r180; PIN_NUMBER "66" at 18798.06,16016.28 h25 r180; PIN_NUMBER "65" at 18798.06,16095.02 h25 r180; PIN_NUMBER "54" at 18325.62,16016.28 h25 r180; PIN_NUMBER "53" at 18325.62,16095.02 h25 r180; PIN_NUMBER "32" at 17459.48,16016.28 h25 r180; PIN_NUMBER "31" at 17459.48,16095.02 h25 r180; PIN_NUMBER "28" at 17302,16016.28 h25 r180; PIN_NUMBER "27" at 17302,16095.02 h25 r180; PIN_NUMBER "26" at 17223.26,16016.28 h25 r180; PIN_NUMBER "25" at 17223.26,16095.02 h25 r180; PIN_NUMBER "58" at 18483.1,16016.28 h25 r180; PIN_NUMBER "57" at 18483.1,16095.02 h25 r180; PIN_NUMBER "15" at 16829.56,16095.02 h25 r180; PIN_NUMBER "12" at 16672.08,16016.28 h25 r180; PIN_NUMBER "56" at 18404.36,16016.28 h25 r180; PIN_NUMBER "63" at 18719.32,16095.02 h25 r180; PIN_NUMBER "42" at 17853.18,16016.28 h25 r180; PIN_NUMBER "29" at 17380.74,16095.02 h25 r180; PIN_NUMBER "36" at 17616.96,16016.28 h25 r180; PIN_NUMBER "35" at 17616.96,16095.02 h25 r180; PIN_NUMBER "30" at 17380.74,16016.28 h25 r180; PIN_NUMBER "46" at 18010.66,16016.28 h25 r180; PIN_NUMBER "45" at 18010.66,16095.02 h25 r180; PIN_NUMBER "50" at 18168.14,16016.28 h25 r180; PIN_NUMBER "49" at 18168.14,16095.02 h25 r180; PIN_NUMBER "55" at 18404.36,16095.02 h25 r180; PIN_NUMBER "52" at 18246.88,16016.28 h25 r180; PIN_NUMBER "51" at 18246.88,16095.02 h25 r180; PIN_NUMBER "24" at 17144.52,16016.28 h25 r180; PIN_NUMBER "10" at 16593.34,16016.28 h25 r180; PIN_NUMBER "9" at 16603.34,16095.02 h25 r180; PIN_NUMBER "22" at 17065.78,16016.28 h25 r180; PIN_NUMBER "21" at 17065.78,16095.02 h25 r180; PIN_NUMBER "16" at 16829.56,16016.28 h25 r180; PIN_NUMBER "23" at 17144.52,16095.02 h25 r180; PIN_NUMBER "11" at 16672.08,16095.02 h25 r180; PIN_NUMBER "78" at 19270.5,16016.28 h25 r180; PIN_NUMBER "77" at 19270.5,16095.02 h25 r180; PIN_NUMBER "70" at 18955.54,16016.28 h25 r180; PIN_NUMBER "69" at 18955.54,16095.02 h25 r180; PIN_NUMBER "76" at 19191.76,16016.28 h25 r180; PIN_NUMBER "75" at 19191.76,16095.02 h25 r180; PIN_NUMBER "74" at 19113.02,16016.28 h25 r180; PIN_NUMBER "73" at 19113.02,16095.02 h25 r180; PIN_NUMBER "72" at 19034.28,16016.28 h25 r180; PIN_NUMBER "71" at 19034.28,16095.02 h25 r180; PIN_NUMBER "41" at 17853.18,16095.02 h25 r180; PIN_NUMBER "18" at 16908.3,16016.28 h25 r180; PIN_NUMBER "17" at 16908.3,16095.02 h25 r180; PIN_NUMBER "14" at 16750.82,16016.28 h25 r180; PIN_NUMBER "13" at 16750.82,16095.02 h25 r180; PIN_NUMBER "64" at 18719.32,16016.28 h25 r180
J3: PIN_NUMBER "39" at 19349.24,14441.48 h25 r90; PIN_NUMBER "40" at 19270.5,14441.48 h25 r90; PIN_NUMBER "19" at 19349.24,15228.88 h25 r90; PIN_NUMBER "20" at 19270.5,15228.88 h25 r90; PIN_NUMBER "2" at 19280.5,15937.54 h25 r90; PIN_NUMBER "1" at 19359.24,15937.54 h25 r90; PIN_NUMBER "28" at 19270.5,14913.92 h25 r90; PIN_NUMBER "27" at 19349.24,14913.92 h25 r90; PIN_NUMBER "6" at 19280.5,15780.06 h25 r90; PIN_NUMBER "5" at 19359.24,15780.06 h25 r90; PIN_NUMBER "17" at 19349.24,15307.62 h25 r90; PIN_NUMBER "23" at 19349.24,15071.4 h25 r90; PIN_NUMBER "18" at 19270.5,15307.62 h25 r90; PIN_NUMBER "14" at 19270.5,15465.1 h25 r90; PIN_NUMBER "13" at 19349.24,15465.1 h25 r90; PIN_NUMBER "24" at 19270.5,15071.4 h25 r90; PIN_NUMBER "21" at 19349.24,15150.14 h25 r90; PIN_NUMBER "26" at 19270.5,14992.66 h25 r90; PIN_NUMBER "25" at 19349.24,14992.66 h25 r90; PIN_NUMBER "22" at 19270.5,15150.14 h25 r90; PIN_NUMBER "29" at 19349.24,14835.18 h25 r90; PIN_NUMBER "30" at 19270.5,14835.18 h25 r90; PIN_NUMBER "10" at 19270.5,15622.58 h25 r90; PIN_NUMBER "9" at 19359.24,15622.58 h25 r90; PIN_NUMBER "12" at 19270.5,15543.84 h25 r90; PIN_NUMBER "11" at 19349.24,15543.84 h25 r90; PIN_NUMBER "8" at 19280.5,15701.32 h25 r90; PIN_NUMBER "7" at 19359.24,15701.32 h25 r90; PIN_NUMBER "4" at 19280.5,15858.8 h25 r90; PIN_NUMBER "3" at 19359.24,15858.8 h25 r90; PIN_NUMBER "36" at 19270.5,14598.96 h25 r90; PIN_NUMBER "35" at 19349.24,14598.96 h25 r90; PIN_NUMBER "38" at 19270.5,14520.22 h25 r90; PIN_NUMBER "37" at 19349.24,14520.22 h25 r90; PIN_NUMBER "34" at 19270.5,14677.7 h25 r90; PIN_NUMBER "33" at 19349.24,14677.7 h25 r90; PIN_NUMBER "32" at 19270.5,14756.44 h25 r90; PIN_NUMBER "31" at 19349.24,14756.44 h25 r90; PIN_NUMBER "16" at 19270.5,15386.36 h25 r90; PIN_NUMBER "15" at 19349.24,15386.36 h25 r90
J5: PIN_NUMBER "79" at 19349.24,14362.74 h25 r180; PIN_NUMBER "80" at 19349.24,14284 h25 r180; PIN_NUMBER "19" at 16987.04,14362.74 h25 r180; PIN_NUMBER "39" at 17774.44,14362.74 h25 r180; PIN_NUMBER "59" at 18561.84,14362.74 h25 r180; PIN_NUMBER "20" at 16987.04,14284 h25 r180; PIN_NUMBER "40" at 17774.44,14284 h25 r180; PIN_NUMBER "60" at 18561.84,14284 h25 r180; PIN_NUMBER "8" at 16524.6,14284 h25 r180; PIN_NUMBER "2" at 16288.38,14284 h25 r180; PIN_NUMBER "1" at 16288.38,14362.74 h25 r180; PIN_NUMBER "5" at 16445.86,14362.74 h25 r180; PIN_NUMBER "6" at 16445.86,14284 h25 r180; PIN_NUMBER "4" at 16367.12,14284 h25 r180; PIN_NUMBER "7" at 16524.6,14362.74 h25 r180; PIN_NUMBER "3" at 16367.12,14362.74 h25 r180; PIN_NUMBER "10" at 16593.34,14284 h25 r180; PIN_NUMBER "11" at 16672.08,14362.74 h25 r180; PIN_NUMBER "28" at 17302,14284 h25 r180; PIN_NUMBER "22" at 17065.78,14284 h25 r180; PIN_NUMBER "27" at 17302,14362.74 h25 r180; PIN_NUMBER "25" at 17223.26,14362.74 h25 r180; PIN_NUMBER "26" at 17223.26,14284 h25 r180; PIN_NUMBER "21" at 17065.78,14362.74 h25 r180; PIN_NUMBER "18" at 16908.3,14284 h25 r180; PIN_NUMBER "17" at 16908.3,14362.74 h25 r180; PIN_NUMBER "24" at 17144.52,14284 h25 r180; PIN_NUMBER "12" at 16672.08,14284 h25 r180; PIN_NUMBER "23" at 17144.52,14362.74 h25 r180; PIN_NUMBER "15" at 16829.56,14362.74 h25 r180; PIN_NUMBER "16" at 16829.56,14284 h25 r180; PIN_NUMBER "66" at 18798.06,14284 h25 r180; PIN_NUMBER "69" at 18955.54,14362.74 h25 r180; PIN_NUMBER "65" at 18798.06,14362.74 h25 r180; PIN_NUMBER "56" at 18404.36,14284 h25 r180; PIN_NUMBER "70" at 18955.54,14284 h25 r180; PIN_NUMBER "67" at 18876.8,14362.74 h25 r180; PIN_NUMBER "68" at 18876.8,14284 h25 r180; PIN_NUMBER "72" at 19034.28,14284 h25 r180; PIN_NUMBER "63" at 18719.32,14362.74 h25 r180; PIN_NUMBER "57" at 18483.1,14362.74 h25 r180; PIN_NUMBER "64" at 18719.32,14284 h25 r180; PIN_NUMBER "58" at 18483.1,14284 h25 r180; PIN_NUMBER "71" at 19034.28,14362.74 h25 r180; PIN_NUMBER "55" at 18404.36,14362.74 h25 r180; PIN_NUMBER "78" at 19270.5,14284 h25 r180; PIN_NUMBER "53" at 18325.62,14362.74 h25 r180; PIN_NUMBER "76" at 19191.76,14284 h25 r180; PIN_NUMBER "75" at 19191.76,14362.74 h25 r180; PIN_NUMBER "54" at 18325.62,14284 h25 r180; PIN_NUMBER "77" at 19270.5,14362.74 h25 r180; PIN_NUMBER "49" at 18168.14,14362.74 h25 r180; PIN_NUMBER "50" at 18168.14,14284 h25 r180; PIN_NUMBER "38" at 17695.7,14284 h25 r180; PIN_NUMBER "45" at 18010.66,14362.74 h25 r180; PIN_NUMBER "61" at 18640.58,14362.74 h25 r180; PIN_NUMBER "36" at 17616.96,14284 h25 r180; PIN_NUMBER "30" at 17380.74,14284 h25 r180; PIN_NUMBER "34" at 17538.22,14284 h25 r180; PIN_NUMBER "42" at 17853.18,14284 h25 r180; PIN_NUMBER "44" at 17931.92,14284 h25 r180; PIN_NUMBER "62" at 18640.58,14284 h25 r180; PIN_NUMBER "32" at 17459.48,14284 h25 r180; PIN_NUMBER "46" at 18010.66,14284 h25 r180; PIN_NUMBER "33" at 17538.22,14362.74 h25 r180; PIN_NUMBER "41" at 17853.18,14362.74 h25 r180; PIN_NUMBER "37" at 17695.7,14362.74 h25 r180; PIN_NUMBER "35" at 17616.96,14362.74 h25 r180; PIN_NUMBER "31" at 17459.48,14362.74 h25 r180; PIN_NUMBER "47" at 18089.4,14362.74 h25 r180; PIN_NUMBER "48" at 18089.4,14284 h25 r180; PIN_NUMBER "29" at 17380.74,14362.74 h25 r180; PIN_NUMBER "9" at 16603.34,14362.74 h25 r180; PIN_NUMBER "14" at 16750.82,14284 h25 r180; PIN_NUMBER "13" at 16750.82,14362.74 h25 r180; PIN_NUMBER "74" at 19113.02,14284 h25 r180; PIN_NUMBER "73" at 19113.02,14362.74 h25 r180; PIN_NUMBER "52" at 18246.88,14284 h25 r180; PIN_NUMBER "51" at 18246.88,14362.74 h25 r180; PIN_NUMBER "43" at 17931.92,14362.74 h25 r180